# EAGLE board Schematic_Open-Book v1 (EAGLE 9.7.0)
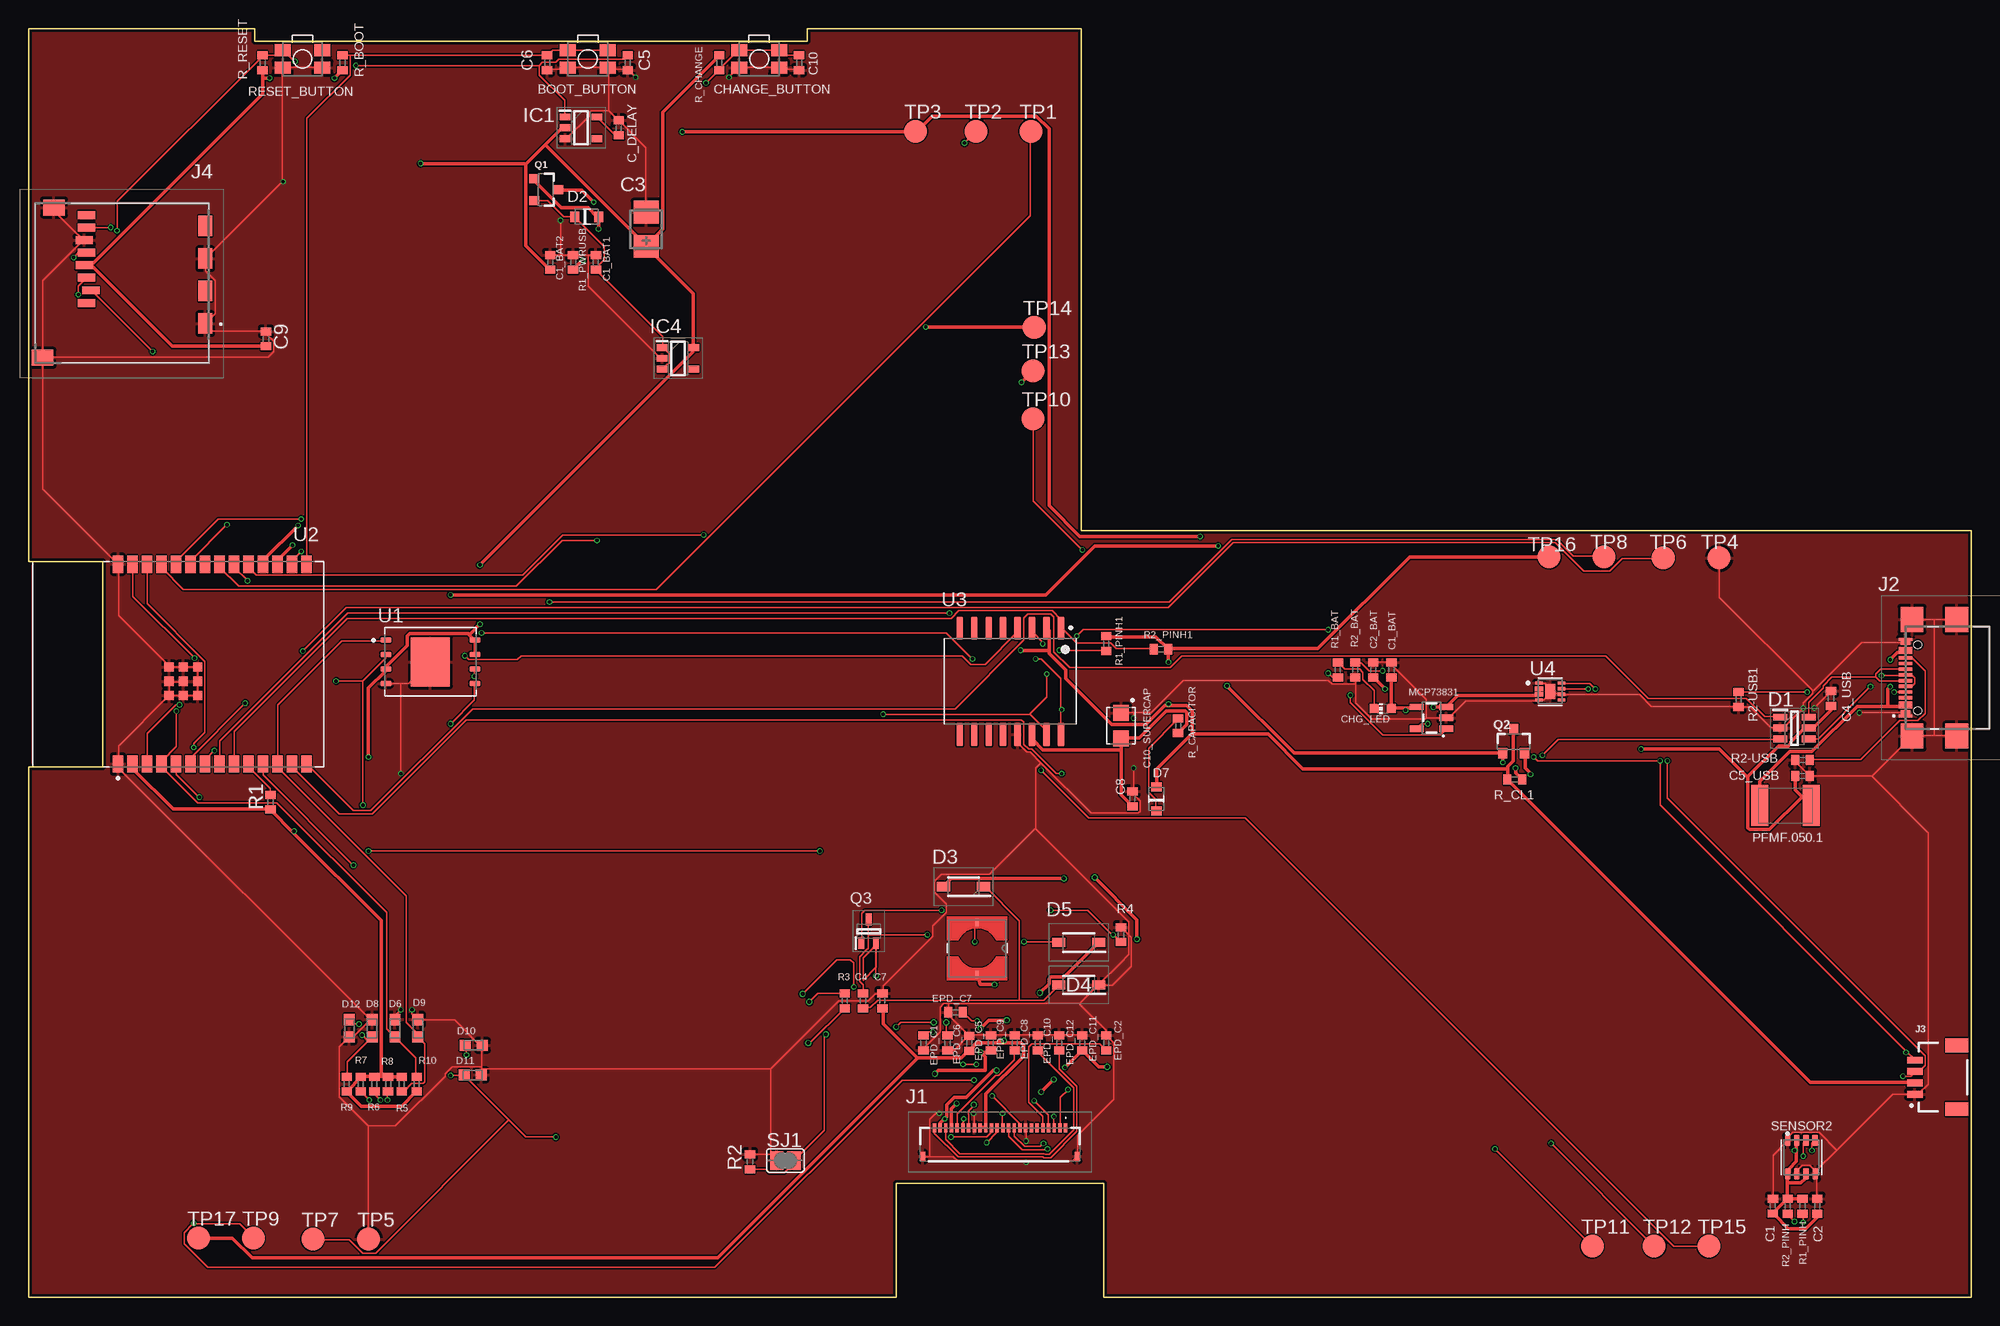
[diagram p0: board, top side]
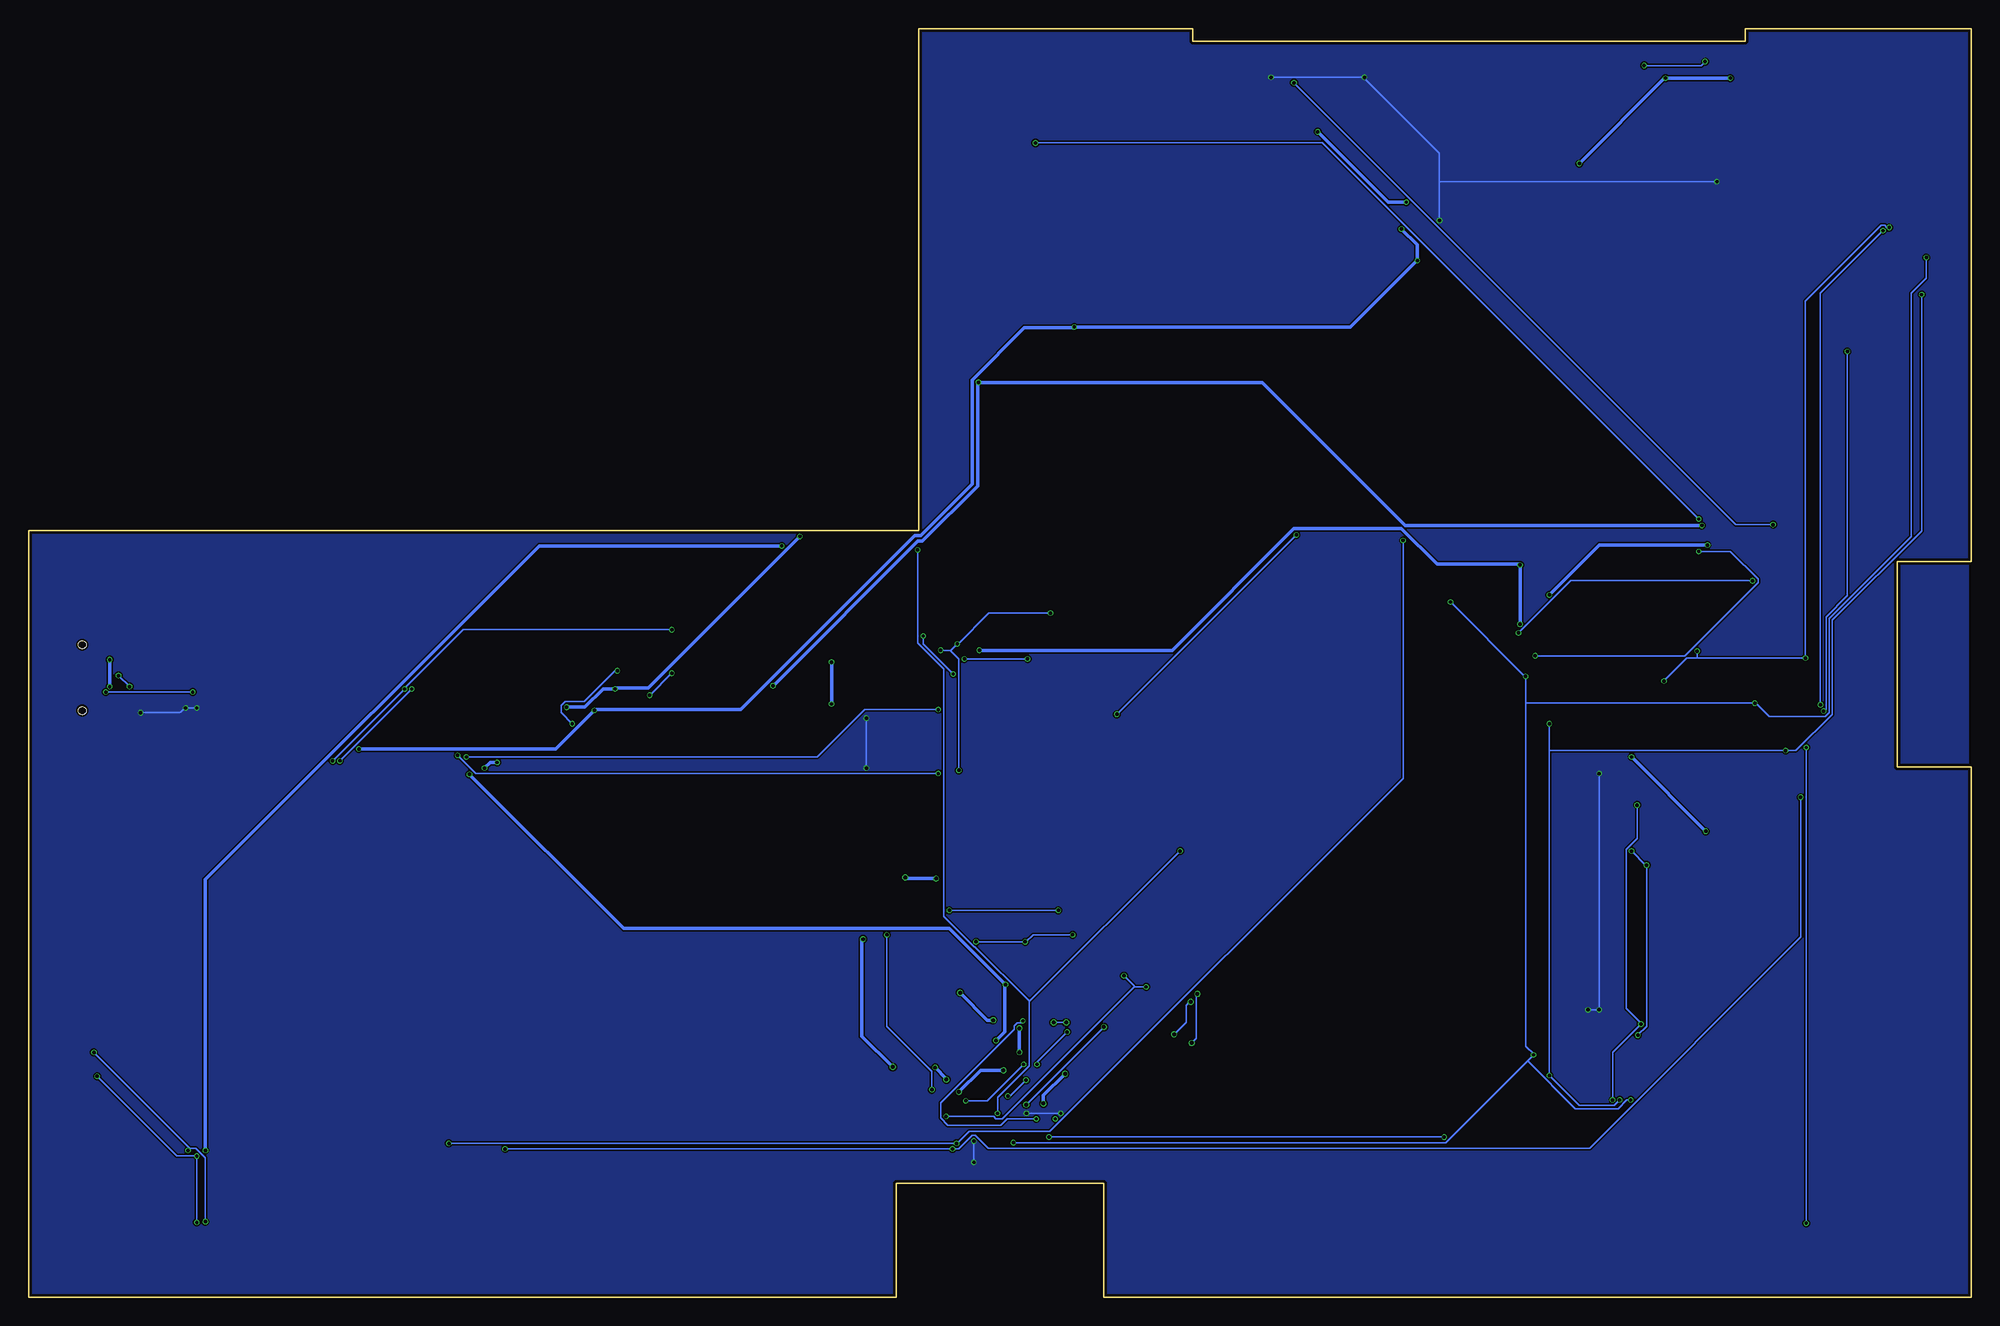
[diagram p1: board, bottom side, seen from below]

Size 170.2 x 111.2 mm. Coordinates in mm from the lower left corner, seen from the top.
Outline: 170.2,67.2 92.2,67.2 92.2,111.2 68.2,111.2 68.2,110.1 19.8,110.1 19.8,111.2 0,111.2 0,64.5 6.5,64.5 6.5,46.5 0,46.5 0,0 76,0 76,10 94.2,10 94.2,0 170.2,0 170.2,67.2
Copper layers (1*16): Top 0.035mm / dielectric 1.6mm / Bottom 0.035mm
Design rules "jlcpcb-2layers.dru": minimum track width 0.15mm, minimum drill 0.3mm, track to track 5mil, track to pad 5mil, pad to pad 5mil, via to via 5mil, smd to smd 5mil, copper to edge 0.2mm, drill to drill 6mil, minimum pad ring 10mil, minimum via ring 3mil, stop-mask expansion 4mil, vias tented up to drill 0mil, thermal gap 10mil
Net classes: 1 new_netclass: width 0.3 mm

## Footprints (pad centres in the part's own frame; a part is rotated, then mirrored left to right if it is on the bottom)
MYBUTTON = smd 1.4 x 1.05: 1 1.75,0.75; 2 -1.75,0.75; 3 -1.75,-0.75; 4 1.75,-0.75
ESP32_WROVER_EAGLE-LTSPICE_C0402 = smd 0.7 x 0.9: 1 -0.65,0; 2 0.65,0
RCL_CT3528 = smd 2 x 2.2: + -1.5,0; - 1.5,0
EAGLE-LTSPICE_C0402 = smd 0.7 x 0.9: 1 -0.65,0; 2 0.65,0
CAPCP3225X100N = smd 1.4 x 1.4: 1 -1.1,0; 2 1.1,0
ADAFRUIT_CHIP-LED0603 = smd 0.8 x 0.8: A 0,-0.75; C 0,0.75
SOT95P280X145-6N = smd 1.2 x 0.6: 1 -1.25,0.95; 2 -1.25,0; 3 -1.25,-0.95; 4 1.25,-0.95; 5 1.25,0; 6 1.25,0.95
ESP32_WROVER_AVX---SD0805S020S1R0_AVX_SD0805S020S1R0_0 = smd 0.8 x 0.9: 1 -1.05,0; 2 1.05,0
SOD3716X135N = smd 1.15 x 0.8: 1 -1.75,0; 2 1.75,0
DIOC1608X36N = smd 0.97 x 0.94: 1 -0.75,0; 2 0.75,0
SOT95P280X125-5N = smd 0.9 x 0.6: 1 -1.4,0.95; 2 -1.4,0; 3 -1.4,-0.95; 4 1.4,-0.95; 5 1.4,0.95
SOT95P280X120-5N = smd 0.9 x 0.6: 1 -1.4,0.95; 2 -1.4,0; 3 -1.4,-0.95; 4 1.4,-0.95; 5 1.4,0.95
FH34SRJ24S05SH99 = smd 0.3 x 0.8: 1 5.75,1.45; 2 5.25,1.45; 3 4.75,1.45; 4 4.25,1.45; 5 3.75,1.45; 6 3.25,1.45; 7 2.75,1.45; 8 2.25,1.45; 9 1.75,1.45; 10 1.25,1.45; 11 0.75,1.45; 12 0.25,1.45; 13 -0.25,1.45; 14 -0.75,1.45; 15 -1.25,1.45; 16 -1.75,1.45; 17 -2.25,1.45; 18 -2.75,1.45; 19 -3.25,1.45; 20 -3.75,1.45; 21 -4.25,1.45; 22 -4.75,1.45; 23 -5.25,1.45; 24 -5.75,1.45 | smd 0.4 x 0.8: MP1 6.75,-1.05; MP2 -6.75,-1.05
SAMACSYS_PARTS_USB4110GFA = smd 0.3 x 1.15: A1 -3.35,3.678; A4 -2.55,3.678; A5 -1.25,3.678; A6 -0.25,3.678; A7 0.25,3.678; A8 1.25,3.678; A9 2.55,3.678; A12 3.35,3.678; B4 2.25,3.678; B5 1.75,3.678; B6 0.75,3.678; B7 -0.75,3.678; B8 -1.75,3.678; B9 -2.25,3.678 | smd 0.406 x 0.813: B1 3.05,3.678; B12 -3.05,3.678 | smd 2.18 x 2: MP1 -5.11,-0.827; MP2 5.11,-0.827; MP3 -5.11,3.103; MP4 5.11,3.103 | hole 0.65: -2.89,2.603; 2.89,2.603
JST04_1MM_RA = smd 0.6 x 1.35: 1 -1.5,0; 2 -0.5,0; 3 0.5,0; 4 1.5,0 | smd 1.2 x 2: NC1 2.8,-3.675; NC2 -2.8,-3.675
112ATAARR03ATTEND = smd 1.8 x 1.2: G1 10.6,10.4; G2 4.9,10.4; S1 7.75,10.4; S2 2.05,10.4 | smd 1.4 x 1.9: G3 13.6,-3.85; G4 0.45,-2.85 | smd 0.7 x 1.5: P1 8.8,0; P2 7.7,0.4; P3 6.6,0; P4 5.5,-0.2; P5 4.4,0; P6 3.3,-0.2; P7 2.2,0; P8 1.1,0
IND_4828-WE-TPC_WRE = smd 0.61 x 0.305: 1 -2.286,0; 2 2.286,0
ESP32_WROVER_SPARKFUN-IC-POWER_SOT23-5 = smd 0.55 x 1.2: 1 -0.95,-1.3; 2 0,-1.3; 3 0.95,-1.3; 4 0.95,1.3; 5 -0.95,1.3
ESP32C6_VARISTOR_CT/CN1812 = smd 1.5 x 3.6: 1 -2.25,0; 2 2.25,0
ESP32_WROVER_SPARKFUN-DISCRETESEMI_SOT23-3 = smd 0.8 x 0.9: 1 -0.95,-1; 2 0.95,-1; 3 0,1.1
SOT65P210X110-3N = smd 1.05 x 0.5: 1 -1.05,0.65; 2 -1.05,-0.65; 3 1.05,0
ESP32_WROVER_EAGLE-LTSPICE_R0402 = smd 0.7 x 0.9: 1 -0.65,0; 2 0.65,0
ESP32_WROVER_BME680_PSON80P300X300X100-8N = smd 1.016 x 0.5: 1 1.458,1.2; 2 1.458,0.4; 3 1.458,-0.4; 4 1.458,-1.2; 5 -1.458,-1.22; 6 -1.458,-0.4; 7 -1.458,0.4; 8 -1.458,1.2
SJ = smd 1.168 x 1.6: 1 -0.762,0; 2 0.762,0
TP20R = smd 2 x 2: TP 0,0
SON127P600X800X80-9N = smd 0.94 x 0.44: 1 -3.895,1.905; 2 -3.895,0.635; 3 -3.895,-0.635; 4 -3.895,-1.905; 5 3.895,-1.905; 6 3.895,-0.635; 7 3.895,0.635; 8 3.895,1.905 | smd 3.4 x 4.3: 9 0,0
XCVR_ESP32-C6-WROOM-1-N8 = smd 1.5 x 0.9: 1 -8.75,5.26; 2 -8.75,3.99; 3 -8.75,2.72; 4 -8.75,1.45; 5 -8.75,0.18; 6 -8.75,-1.09; 7 -8.75,-2.36; 8 -8.75,-3.63; 9 -8.75,-4.9; 10 -8.75,-6.17; 11 -8.75,-7.44; 12 -8.75,-8.71; 13 -8.75,-9.98; 14 -8.75,-11.25; 15 8.75,-11.25; 16 8.75,-9.98; 17 8.75,-8.71; 18 8.75,-7.44; 19 8.75,-6.17; 20 8.75,-4.9; 21 8.75,-3.63; 22 8.75,-2.36; 23 8.75,-1.09; 24 8.75,0.18; 25 8.75,1.45; 26 8.75,2.72; 27 8.75,3.99; 28 8.75,5.26 | smd 0.8 x 0.8: 29_1 -2.755,0.79; 29_2 -1.505,0.79; 29_3 -0.255,0.79; 29_4 -2.755,-0.46; 29_5 -1.505,-0.46; 29_6 -0.255,-0.46; 29_7 -2.755,-1.71; 29_8 -1.505,-1.71; 29_9 -0.255,-1.71
SOIC127P1032X265-16N = smd 2.05 x 0.59: 1 -4.655,4.445; 2 -4.655,3.175; 3 -4.655,1.905; 4 -4.655,0.635; 5 -4.655,-0.635; 6 -4.655,-1.905; 7 -4.655,-3.175; 8 -4.655,-4.445; 9 4.655,-4.445; 10 4.655,-3.175; 11 4.655,-1.905; 12 4.655,-0.635; 13 4.655,0.635; 14 4.655,1.905; 15 4.655,3.175; 16 4.655,4.445
SON50P200X200X80-9N = smd 0.76 x 0.27: 1 -0.985,0.75; 4 -0.985,-0.75; 5 0.985,-0.75; 6 0.985,-0.25; 7 0.985,0.25; 8 0.985,0.75 | smd 0.813 x 0.406: 2 -0.985,0.25; 3 -0.985,-0.25 | smd 0.9 x 1.3: 9 0,0

## Placement (x,y rotation side)
BOOT_BUTTON  BOOT_BUTTON  [MYBUTTON]  49,108.53 180 top
C1  100nF  [ESP32_WROVER_EAGLE-LTSPICE_C0402]  152.8,8 89.4 top
C1_BAT  4.7uF  [ESP32_WROVER_EAGLE-LTSPICE_C0402]  119.4,55 90 top
C1_BAT1  4.7uF  [ESP32_WROVER_EAGLE-LTSPICE_C0402]  49.7,90.7 90 top
C1_BAT2  4.7uF  [ESP32_WROVER_EAGLE-LTSPICE_C0402]  45.7,90.7 90 top
C2  100nF  [ESP32_WROVER_EAGLE-LTSPICE_C0402]  156.7,8 90 top
C2_BAT  4.7uF  [ESP32_WROVER_EAGLE-LTSPICE_C0402]  117.8,55 90 top
C3  100uF TANT  [RCL_CT3528]  54.1,93.6 90 top
C4  4.7uF/25V  [ESP32_WROVER_EAGLE-LTSPICE_C0402]  73.1,26 90 top
C4_USB  100nF  [EAGLE-LTSPICE_C0402]  157.9,52.5 90 top
C5  1uF  [ESP32_WROVER_EAGLE-LTSPICE_C0402]  52.5,108.2 270 top
C5_USB  4.7uF  [EAGLE-LTSPICE_C0402]  155.4,45.7 0 top
C6  100nF  [ESP32_WROVER_EAGLE-LTSPICE_C0402]  45.42,108.2 270 top
C7  10uF  [ESP32_WROVER_EAGLE-LTSPICE_C0402]  74.8,26 90 top
C8  100nF  [ESP32_WROVER_EAGLE-LTSPICE_C0402]  96.7,43.7 90 top
C9  100nF  [ESP32_WROVER_EAGLE-LTSPICE_C0402]  20.8,84 90 top
C10  100nF  [ESP32_WROVER_EAGLE-LTSPICE_C0402]  67.5,108.2 270 top
C10_SUPERCAP  CPH3225A  [CAPCP3225X100N]  95.7,50.1 270 top
C_DELAY  100nF  [ESP32_WROVER_EAGLE-LTSPICE_C0402]  51.7,102.5 90 top
CHANGE_BUTTON  CHANGE_BUTTON  [MYBUTTON]  64,108.53 180 top
CHG_LED  [ADAFRUIT_CHIP-LED0603]  118.62,51.6 90 top
D1  USBLC6-2SC6Y  [SOT95P280X145-6N]  154.7,49.9 0 top
D2  ESP32_WROVER_AVX---SD0805S020S1R0_AVX_SD0805S020S1R0_0_0AVX_SD0805S020S1R0_0_0  [ESP32_WROVER_AVX---SD0805S020S1R0_AVX_SD0805S020S1R0_0]  48.9,94.7 0 top
D3  MBR0530  [SOD3716X135N]  81.9,36 180 top
D4  MBR0530  [SOD3716X135N]  92,27.4 180 top
D5  MBR0530  [SOD3716X135N]  92,31.1 180 top
D6  PGB1010603MR  [DIOC1608X36N]  32.1,23.6 90 top
D7  ESP32_WROVER_AVX---SD0805S020S1R0_AVX_SD0805S020S1R0_0_0AVX_SD0805S020S1R0_0_0  [ESP32_WROVER_AVX---SD0805S020S1R0_AVX_SD0805S020S1R0_0]  98.8,43.7 90 top
D8  PGB1010603MR  [DIOC1608X36N]  30.1,23.6 90 top
D9  PGB1010603MR  [DIOC1608X36N]  34.1,23.6 90 top
D10  PGB1010603MR  [DIOC1608X36N]  39,22.1 0 top
D11  PGB1010603MR  [DIOC1608X36N]  38.9,19.5 0 top
D12  PGB1010603MR  [DIOC1608X36N]  28.1,23.6 270 top
EPD_C1  1uF/50V  [ESP32_WROVER_EAGLE-LTSPICE_C0402]  78.4,22.3 270 top
EPD_C2  1uF/50V  [ESP32_WROVER_EAGLE-LTSPICE_C0402]  94.4,22.3 90 top
EPD_C5  0.1uF/50V  [EAGLE-LTSPICE_C0402]  82.4,22.27 90 top
EPD_C6  1uF/50V  [EAGLE-LTSPICE_C0402]  80.5,22.3 270 top
EPD_C7  1uF/50V  [EAGLE-LTSPICE_C0402]  81.2,25 180 top
EPD_C8  1uF/50V  [EAGLE-LTSPICE_C0402]  86.4,22.3 90 top
EPD_C9  1uF/50V  [EAGLE-LTSPICE_C0402]  84.3,22.3 90 top
EPD_C10  1uF/50V  [EAGLE-LTSPICE_C0402]  88.4,22.3 90 top
EPD_C11  1uF/50V  [EAGLE-LTSPICE_C0402]  92.3,22.3 90 top
EPD_C12  1uF/50V  [EAGLE-LTSPICE_C0402]  90.3,22.3 90 top
IC1  BD5229G-TR  [SOT95P280X125-5N]  48.4,102.5 0 top
IC4  XC6220A331MR-G  [SOT95P280X120-5N]  56.9,82.3 0 top
J1  FH34SRJ-24S-0.5SH_99_  [FH34SRJ24S05SH99]  85.1,13.4 0 top
J2  SAMACSYS_PARTS_USB4110-GF-A  [SAMACSYS_PARTS_USB4110GFA]  168.1,54.31 90 top
J3  QWIIC_RIGHT_ANGLE  [JST04_1MM_RA]  165.25,19.3 90 top
J4  112A-TAAR-R03_ATTEND  [112ATAARR03ATTEND]  5.08,95.95 270 top
L1  68uH  [IND_4828-WE-TPC_WRE]  83.1,30.6 270 top
MCP73831  ESP32_WROVER_SPARKFUN-IC-POWER_MCP73831  [ESP32_WROVER_SPARKFUN-IC-POWER_SOT23-5]  122.9,50.8 90 top
PFMF.050.1  ESP32C6_VARISTORCN1812  [ESP32C6_VARISTOR_CT/CN1812]  153.9,43.1 0 top
Q1  20V/4.2A/52mΩ/1.4W  [ESP32_WROVER_SPARKFUN-DISCRETESEMI_SOT23-3]  45.3,97.08 270 top
Q2  20V/4.2A/52mΩ/1.4W  [ESP32_WROVER_SPARKFUN-DISCRETESEMI_SOT23-3]  130.1,48.7 0 top
Q3  SI1308EDL-T1-GE3  [SOT65P210X110-3N]  73.6,32.1 90 top
R1  10k  [ESP32_WROVER_EAGLE-LTSPICE_R0402]  21.2,43.4 90 top
R1_BAT  200  [ESP32_WROVER_EAGLE-LTSPICE_R0402]  114.7,55 90 top
R1_PINH  10k  [ESP32_WROVER_EAGLE-LTSPICE_R0402]  155.4,8 90 top
R1_PINH1  10k  [ESP32_WROVER_EAGLE-LTSPICE_R0402]  94.4,57.3 90 top
R1_PWRUSB  100k  [ESP32_WROVER_EAGLE-LTSPICE_R0402]  47.7,90.7 90 top
R2  2.2  [ESP32_WROVER_EAGLE-LTSPICE_R0402]  63.2,11.9 270 top
R2-USB  5k1  [ESP32_WROVER_EAGLE-LTSPICE_R0402]  155.4,47.1 180 top
R2-USB1  5k1  [ESP32_WROVER_EAGLE-LTSPICE_R0402]  149.8,52.4 90 top
R2_BAT  2k  [ESP32_WROVER_EAGLE-LTSPICE_R0402]  116.23,55 90 top
R2_PINH  10k  [ESP32_WROVER_EAGLE-LTSPICE_R0402]  154.1,8 90 top
R2_PINH1  10k  [ESP32_WROVER_EAGLE-LTSPICE_R0402]  99.2,56.8 0 top
R3  0.47  [ESP32_WROVER_EAGLE-LTSPICE_R0402]  71.5,26 90 top
R4  10k  [ESP32_WROVER_EAGLE-LTSPICE_R0402]  95.7,31.8 90 top
R5  10k  [ESP32_WROVER_EAGLE-LTSPICE_R0402]  32.7,18.7 90 top
R6  10k  [ESP32_WROVER_EAGLE-LTSPICE_R0402]  30.3,18.7 90 top
R7  10k  [ESP32_WROVER_EAGLE-LTSPICE_R0402]  29.1,18.7 90 top
R8  10k  [ESP32_WROVER_EAGLE-LTSPICE_R0402]  31.5,18.7 90 top
R9  10k  [ESP32_WROVER_EAGLE-LTSPICE_R0402]  27.87,18.7 270 top
R10  10k  [ESP32_WROVER_EAGLE-LTSPICE_R0402]  34,18.7 270 top
R_BOOT  10k  [ESP32_WROVER_EAGLE-LTSPICE_R0402]  27.5,108.2 90 top
R_CAPACITOR  15  [ESP32_WROVER_EAGLE-LTSPICE_R0402]  100.7,50.1 90 top
R_CHANGE  10k  [ESP32_WROVER_EAGLE-LTSPICE_R0402]  60.5,108.2 270 top
R_CL1  10k  [ESP32_WROVER_EAGLE-LTSPICE_R0402]  130.2,45.4 0 top
R_RESET  10k  [ESP32_WROVER_EAGLE-LTSPICE_R0402]  20.5,108.19 90 top
RESET_BUTTON  RESET_BUTTON  [MYBUTTON]  24,108.53 180 top
SENSOR2  BME688  [ESP32_WROVER_BME680_PSON80P300X300X100-8N]  155.3,12.3 90 top
SJ1  [SJ]  66.3,12 0 top
TP1  TPTP20R  [TP20R]  87.8,102.2 0 top
TP2  TPTP20R  [TP20R]  83,102.2 0 top
TP3  TPTP20R  [TP20R]  77.7,102.2 0 top
TP4  TPTP20R  [TP20R]  148.1,64.8 0 top
TP5  TPTP20R  [TP20R]  29.8,5.1 0 top
TP6  TPTP20R  [TP20R]  143.2,64.8 0 top
TP7  TPTP20R  [TP20R]  24.9,5.1 0 top
TP8  TPTP20R  [TP20R]  138,64.9 0 top
TP9  TPTP20R  [TP20R]  19.7,5.2 0 top
TP10  TPTP20R  [TP20R]  88,77 0 top
TP11  TPTP20R  [TP20R]  137,4.5 0 top
TP12  TPTP20R  [TP20R]  142.4,4.5 0 top
TP13  TPTP20R  [TP20R]  88,81.2 0 top
TP14  TPTP20R  [TP20R]  88.1,85 0 top
TP15  TPTP20R  [TP20R]  147.2,4.5 0 top
TP16  TPTP20R  [TP20R]  133.2,64.9 0 top
TP17  TPTP20R  [TP20R]  14.9,5.2 0 top
U1  W25Q512JVEIQ  [SON127P600X800X80-9N]  35.2,55.7 0 top
U2  ESP32-C6-WROOM-1-N8  [XCVR_ESP32-C6-WROOM-1-N8]  13.1,55.5 90 top
U3  DS3231SN#  [SOIC127P1032X265-16N]  86,54 270 top
U4  MAX17048G+T10  [SON50P200X200X80-9N]  133.3,53.1 0 top

## Library data of the parts
BOOT_BUTTON CHANGE_BUTTON CHG_LED PFMF.050.1 RESET_BUTTON SJ1 TP1-TP17 = DeskAssistant v19 v1
C1 C1_BAT C1_BAT1 C1_BAT2 C2 C2_BAT C4 C4_USB C5 C5_USB C6-C10 C_DELAY EPD_C1 EPD_C2 EPD_C5-EPD_C12 = DeskAssistant v19 v1; SPICEMODEL: NONE; SPICEPREFIX: C
C3 = DeskAssistant v19 v1; SPICEPREFIX: C
C10_SUPERCAP = DeskAssistant v19 v1; AVAILABILITY: Not in stock; CHECK_PRICES: https://www.snapeda.com/parts/CPH3225A/Seiko+Instruments/view-part/?ref=eda; DESCRIPTION: 11 mF (EDLC) Supercapacitor 3.3 V 1210 (3225 Metric) - -; MF: Seiko Instruments; MP: CPH3225A; PACKAGE: 1210 Seiko; PRICE: None; PURCHASE-URL: https://www.snapeda.com/api/url_track_click_mouser/?unipart_id=562593&manufacturer=Seiko Instruments&part_name=CPH3225A&search_term=None; SNAPEDA_LINK: https://www.snapeda.com/parts/CPH3225A/Seiko+Instruments/view-part/?ref=snap
D1 = DeskAssistant v19 v1; AVAILABILITY: In Stock; CHECK_PRICES: https://www.snapeda.com/parts/USBLC6-2SC6Y/STMicroelectronics/view-part/?ref=eda; DESCRIPTION: 17V Clamp 5A (8/20µs) Ipp Tvs Diode Surface Mount SOT-23-6; MF: STMicroelectronics; MP: USBLC6-2SC6Y; PACKAGE: SOT-23-6 STMicroelectronics; PRICE: None; SNAPEDA_LINK: https://www.snapeda.com/parts/USBLC6-2SC6Y/STMicroelectronics/view-part/?ref=snap
D2 D7 = DeskAssistant v19 v1; CENTROID_NOT_SPECIFIED: No; DATASHEET: http://datasheets.avx.com/schottky.pdf; DIGIKEY_DESCRIPTION: DIODE SCHOTTKY 20V 1A 0805; DIGIKEY_PART_NUMBER: 478-7800-1-ND; LEAD_FREE: yes; MF: AVX; MOUSER_PART_NUMBER: 581-SD0805S020S1R0; PACKAGE: 0805 (2012 metric); PREFIX: D; ROHS: yes; TEMPERATURE_RANGE_HIGH: +125°C; TEMPERATURE_RANGE_LOW: -55°C
D3-D5 = DeskAssistant v19 v1; AVAILABILITY: In Stock; CHECK_PRICES: https://www.snapeda.com/parts/MBR0530/Onsemi/view-part/?ref=eda; DESCRIPTION: Diode Schottky 30 V 500mA Surface Mount SOD-123; MF: ON Semiconductor; MP: MBR0530; PACKAGE: SOD-123-2 ON Semiconductor; PRICE: None; PURCHASE-URL: https://www.snapeda.com/api/url_track_click_mouser/?unipart_id=179458&manufacturer=ON Semiconductor&part_name=MBR0530&search_term=None; SNAPEDA_LINK: https://www.snapeda.com/parts/MBR0530/Onsemi/view-part/?ref=snap
D6 D8-D12 = DeskAssistant v19 v1; AVAILABILITY: In Stock; CHECK_PRICES: https://www.snapeda.com/parts/PGB1010603MR/Littelfuse/view-part/?ref=eda; DESCRIPTION: 150V (Typ) Clamp - Ipp Tvs Diode Surface Mount 0603 (1608 Metric); MF: Littelfuse Inc.; MP: PGB1010603MR; PACKAGE: 0603 Littelfuse Inc.; PRICE: None; PURCHASE-URL: https://www.snapeda.com/api/url_track_click_mouser/?unipart_id=5659453&manufacturer=Littelfuse Inc.&part_name=PGB1010603MR&search_term=None; SNAPEDA_LINK: https://www.snapeda.com/parts/PGB1010603MR/Littelfuse/view-part/?ref=snap
IC1 = DeskAssistant v19 v1; DESCRIPTION: Voltage Detector with Adjustable Delay Time: CMOS processes are utilized to develop high precision, low current consumption CMOS reset ICs that allow arbitrary setting of the delay time. The extensive lineup includes both Nch Open Drain and CMOS output types in a wide range of detection voltages (from 2.3V to 6.0V, in 0.1V steps), enabling selection of the ideal solution based on customer requirements. In addition, the entire series is of course both lead-free and RoHS-compliant.; HEIGHT: 1.25mm; MANUFACTURER_NAME: ROHM Semiconductor; MANUFACTURER_PART_NUMBER: BD5229G-TR; MOUSER_PART_NUMBER: 755-BD5229G-TR; MOUSER_PRICE-STOCK: https://www.mouser.co.uk/ProductDetail/ROHM-Semiconductor/BD5229G-TR?qs=4kLU8WoGk0vvnhrrYwdszw%3D%3D
IC4 = DeskAssistant v19 v1; DESCRIPTION: LDO Voltage Regulators; HEIGHT: 1.2mm; MANUFACTURER_NAME: Torex; MANUFACTURER_PART_NUMBER: XC6220A331MR-G; MOUSER_PART_NUMBER: 865-XC6220A331MR-G; MOUSER_PRICE-STOCK: https://www.mouser.co.uk/ProductDetail/Torex-Semiconductor/XC6220A331MR-G?qs=AsjdqWjXhJ8ZSWznL1J0gg%3D%3D
J1 = DeskAssistant v19 v1; DESCRIPTION: 24 Position FFC, FPC Connector Contacts, Top and Bottom 0.020" (0.50mm) Surface Mount, Right Angle; HEIGHT: 1.1mm; MANUFACTURER_NAME: Hirose; MANUFACTURER_PART_NUMBER: FH34SRJ-24S-0.5SH(99); MOUSER_PART_NUMBER: 798-FH34SRJ24S05SH99; MOUSER_PRICE-STOCK: https://www.mouser.co.uk/ProductDetail/Hirose-Connector/FH34SRJ-24S-0.5SH99?qs=vcbW%252B4%252BSTIpKBl5ap9J8Fw%3D%3D
J2 = DeskAssistant v19 v1; DESCRIPTION: CONN USB 2.0 TYPE-C R/A SMT; HEIGHT: 3.26mm; MANUFACTURER_NAME: GCT (GLOBAL CONNECTOR TECHNOLOGY); MANUFACTURER_PART_NUMBER: USB4110-GF-A; MOUSER_PART_NUMBER: 640-USB4110-GF-A; MOUSER_PRICE-STOCK: https://www.mouser.co.uk/ProductDetail/GCT/USB4110-GF-A?qs=KUoIvG%2F9IlYiZvIXQjyJeA%3D%3D
J3 = DeskAssistant v19 v1; PROD_ID: CONN-13694
J4 = DeskAssistant v19 v1; DESCRIPTION: Micro SD Card Socket, Push-Push Type, Top Mount, SMT, H=1.83mm, 10u; HEIGHT: 1.9mm; MANUFACTURER_NAME: ATTEND; MANUFACTURER_PART_NUMBER: 112A-TAAR-R03 ATTEND
L1 = DeskAssistant v19 v1; COPYRIGHT: Copyright (C) 2024 Ultra Librarian. All rights reserved.; MANUFACTURER_PART_NUMBER: 744043680; MFR_NAME: Wurth Electronics
MCP73831 = DeskAssistant v19 v1; PROD_ID: IC-09995
Q1 Q2 = DeskAssistant v19 v1; PROD_ID: TRAN-14388
Q3 = DeskAssistant v19 v1; AVAILABILITY: In Stock; CHECK_PRICES: https://www.snapeda.com/parts/SI1308EDL-T1-GE3/Vishay+Siliconix/view-part/?ref=eda; DESCRIPTION: Si1308EDL-T1-GE3 N-channel MOSFET Transistor, 1.5 A, 30 V, 3-Pin SC-70 | Siliconix / Vishay SI1308EDL-T1-GE3; MF: Vishay Siliconix; MP: SI1308EDL-T1-GE3; PACKAGE: SOT-323 Vishay Semiconductor; PRICE: None; PURCHASE-URL: https://www.snapeda.com/api/url_track_click_mouser/?unipart_id=274603&manufacturer=Vishay Siliconix&part_name=SI1308EDL-T1-GE3&search_term=None; SNAPEDA_LINK: https://www.snapeda.com/parts/SI1308EDL-T1-GE3/Vishay+Siliconix/view-part/?ref=snap
R1 R1_BAT R1_PINH R1_PINH1 R1_PWRUSB R2 R2-USB R2-USB1 R2_BAT R2_PINH R2_PINH1 R3-R10 R_BOOT R_CAPACITOR R_CHANGE R_CL1 R_RESET = DeskAssistant v19 v1; SPICEMODEL: NONE; SPICEPREFIX: R
SENSOR2 = DeskAssistant v19 v1; AVAILABILITY: Unavailable; DESCRIPTION: Integrated Environmental Unit; MF: Bosch Sensortec; MP: BME680; PACKAGE: LGA-8 Bosch Tools; PRICE: None
U1 = DeskAssistant v19 v1; AVAILABILITY: In Stock; CHECK_PRICES: https://www.snapeda.com/parts/W25Q512JVEIQ/Winbond+Electronics/view-part/?ref=eda; DESCRIPTION: FLASH - NOR Memory IC 512Mb (64M x 8) SPI - Quad I/O 133 MHz 8-WSON (8x6); MF: Winbond Electronics; MP: W25Q512JVEIQ; PACKAGE: Package; PRICE: None; SNAPEDA_LINK: https://www.snapeda.com/parts/W25Q512JVEIQ/Winbond+Electronics/view-part/?ref=snap
U2 = DeskAssistant v19 v1; AVAILABILITY: In Stock; CHECK_PRICES: https://www.snapeda.com/parts/ESP32-C6-WROOM-1-N8/Espressif+Systems/view-part/?ref=eda; DESCRIPTION: Multiprotocol Modules ESP32-C6 module, Wi-Fi 6 in 2.4 GHz band, Bluetooth 5, Zigbee 3.0 and Thread. ESP34-WROOM Compatible - ENGINEERING SAMPLE; MF: Espressif Systems; MP: ESP32-C6-WROOM-1-N8; PACKAGE: None; PRICE: None; SNAPEDA_LINK: https://www.snapeda.com/parts/ESP32-C6-WROOM-1-N8/Espressif+Systems/view-part/?ref=snap
U3 = DeskAssistant v19 v1; AVAILABILITY: In Stock; CHECK_PRICES: https://www.snapeda.com/parts/DS3231SN%23/Analog+Devices/view-part/?ref=eda; DESCRIPTION: Extremely Accurate I²C-Integrated RTC/TCXO/Crystal; MF: Analog Devices; MP: DS3231SN#; PACKAGE: SOIC-16 Maxim; PRICE: None; PURCHASE-URL: https://www.snapeda.com/api/url_track_click_mouser/?unipart_id=99048&manufacturer=Analog Devices&part_name=DS3231SN#&search_term=None; SNAPEDA_LINK: https://www.snapeda.com/parts/DS3231SN%23/Analog+Devices/view-part/?ref=snap
U4 = DeskAssistant v19 v1; AVAILABILITY: In Stock; CHECK_PRICES: https://www.snapeda.com/parts/MAX17048G+T10/Analog+Devices/view-part/?ref=eda; DESCRIPTION: 3µA 1-Cell/2-Cell Fuel Gauge with ModelGauge; MF: Analog Devices; MP: MAX17048G+T10; PACKAGE: TDFN-8 Maxim; PRICE: None; PURCHASE-URL: https://www.snapeda.com/api/url_track_click_mouser/?unipart_id=329239&manufacturer=Analog Devices&part_name=MAX17048G+T10&search_term=None; SNAPEDA_LINK: https://www.snapeda.com/parts/MAX17048G+T10/Analog+Devices/view-part/?ref=snap

## Nets
3V3 [new_netclass]: C1_BAT2.1 C3.+ C9.1 D7.2 IC1.2 IC4.5 J3.2 J4.P4 Q2.3 R1.1 R1_PINH1.2 R2_PINH1.2 R5.2 R6.2 R7.2 R8.2 R9.2 R10.2 R_BOOT.1 R_CHANGE.1 R_CL1.1 R_RESET.1 TP16.TP U1.3 U1.7 U1.8 U2.2 U3.2
32KHZ: R2_PINH1.1 U2.9 U3.1
DN: D1.4 J2.A7 J2.B7
DP: D1.6 J2.A6 J2.B6
EPD_3V3 [new_netclass]: C7.1 EPD_C5.1 J1.15 J1.16 L1.2 Q2.2 TP17.TP
EPD_3V3_C [new_netclass]: Q2.1 R_CL1.2 TP13.TP U2.18
EPD_BUSY: J1.9 TP9.TP U2.26
EPD_CS: D8.1 J1.12 R9.1 TP10.TP U2.11
EPD_DC: J1.11 TP11.TP U2.5
EPD_RST: J1.10 TP12.TP U2.21
FLASH_CS: D9.1 R5.1 U1.1 U2.12
GDR: J1.2 Q3.1 R4.1
GND: BOOT_BUTTON.1 BOOT_BUTTON.2 C1.2 C1_BAT1.2 C1_BAT2.2 C1_BAT.2 C2.2 C2_BAT.2 C3.- C4_USB.2 C5.2 C5_USB.2 C6.2 C7.2 C8.2 C9.2 C10.2 C10_SUPERCAP.1 C_DELAY.2 CHANGE_BUTTON.1 CHANGE_BUTTON.2 D1.2 D4.1 D6.2 D8.2 D9.2 D10.2 D11.2 D12.2 EPD_C1.2 EPD_C2.2 EPD_C5.2 EPD_C6.2 EPD_C7.2 EPD_C8.2 EPD_C9.2 EPD_C10.2 EPD_C11.2 EPD_C12.2 IC1.3 IC4.2 J1.8 J1.17 J1.MP1 J1.MP2 J2.A1 J2.A12 J2.B1 J2.B12 J2.MP1 J2.MP2 J2.MP3 J2.MP4 J3.1 J4.G1 J4.G2 J4.G3 J4.G4 J4.P6 MCP73831.2 R1_PWRUSB.2 R2-USB1.1 R2-USB.2 R2.1 R2_BAT.1 R4.2 RESET_BUTTON.1 RESET_BUTTON.2 SENSOR2.1 SENSOR2.5 SENSOR2.7 SJ1.1 TP4.TP TP5.TP U1.4 U1.9 U2.1 U2.28 U2.29_1 U2.29_2 U2.29_3 U2.29_4 U2.29_5 U2.29_6 U2.29_7 U2.29_8 U2.29_9 U3.13 U4.1 U4.4 U4.6 U4.9
GPIO8: R1.2 U2.10
I2C_PW [new_netclass]: C1.1 C2.1 R1_PINH.2 R2_PINH.2 SENSOR2.2 SENSOR2.6 SENSOR2.8 U2.17
INT_RTC: R1_PINH1.1 TP15.TP U2.8 U3.3
IO/BOOT: BOOT_BUTTON.3 BOOT_BUTTON.4 C6.1 R_BOOT.2 U2.15
IO/CHANGE: C10.1 CHANGE_BUTTON.3 CHANGE_BUTTON.4 R_CHANGE.2 U2.23
MISO: D12.1 J4.P7 R8.1 TP6.TP U1.2 U2.27
MOSI: D11.1 J1.14 J4.P3 R6.1 TP7.TP U1.5 U2.7
N$1: J2.B5 R2-USB.1
N$2: J2.A5 R2-USB1.2
N$3: C4.1 D3.1 D4.2
N$4: C1_BAT1.1 D2.1 IC4.1 IC4.3 Q1.2
N$5: MCP73831.5 R2_BAT.2
N$6: CHG_LED.C R1_BAT.2
N$7: MCP73831.1 R1_BAT.1
N$8: C_DELAY.1 IC1.5
N$11: EPD_C2.1 J1.5
N$12: EPD_C1.1 J1.4
N$14: D7.1 R_CAPACITOR.2
N$20: EPD_C12.1 J1.24
N$22: EPD_C10.1 J1.22
N$23: EPD_C8.1 J1.20
N$24: EPD_C7.1 J1.19
N$26: EPD_C6.1 J1.18
PREVGH [new_netclass]: D5.1 EPD_C9.1 J1.21
PREVGL [new_netclass]: D3.2 EPD_C11.1 J1.23
RESE: J1.3 Q3.2 R3.1
RESE': R2.2 R3.2 SJ1.2
RESET: C5.1 IC1.1 R_RESET.2 RESET_BUTTON.4 U2.3
RTC_RST: U2.16 U3.4
RX: TP2.TP U2.24
SCK: D10.1 J1.13 J4.P5 R7.1 TP8.TP U1.6 U2.6
SCL: J3.4 R2_PINH.1 SENSOR2.4 U2.20 U3.16 U4.7
SDA: J3.3 R1_PINH.1 SENSOR2.3 U2.19 U3.15 U4.8
SRC: C4.2 D5.2 L1.1 Q3.3
SS_SD: D6.1 J4.P2 R10.1 U2.4
TX: TP1.TP U2.25
USB_D+: D1.1 U2.14
USB_D-: D1.3 U2.13
VBAT [new_netclass]: C2_BAT.1 MCP73831.3 Q1.3 TP3.TP U4.2 U4.3
VBUS [new_netclass]: C1_BAT.1 C4_USB.1 C5_USB.1 CHG_LED.A D1.5 D2.2 MCP73831.4 PFMF.050.1.2 Q1.1 R1_PWRUSB.1 TP14.TP
VRTC [new_netclass]: C8.1 C10_SUPERCAP.2 R_CAPACITOR.1 U3.14
VUSB [new_netclass]: J2.A4 J2.A9 J2.B4 J2.B9 PFMF.050.1.1

## Tracks (layer width: path | path; a pad name or v marks a point on that pad's centre or on a via)
3V3  (via drill 0.3)
  Top 0.3: R2_PINH1.2 99.79,56.85 98.75,57.89 94.46,57.89 R1_PINH1.2 | TP16.TP 133.17,64.89 120.98,64.89 112.95,56.85 100,56.85 R2_PINH1.2 | 101.94,49.44 98.82,46.33 98.82,44.8 D7.2 | 101.94,49.44 101.94,51.38 101.45,51.87 99.86,51.87 | 99.86,51.87 99.51,51.87 97.85,50.21 94.87,50.21 90.86,54.22 90.86,54.98 89.4,56.44 89.4,56.72 | 89.4,56.72 89.4,58.45 89.19,58.66 U3.2 | 129.57,46.33 129.57,46.54 130.05,47.02 130.05,49.79 Q2.3 | 129.57,46.33 129.57,45.43 R_CL1.1 129.64,45.29 156.09,18.84 165.23,18.84 J3.2 | 129.57,46.33 111.63,46.33 108.58,49.38 102.08,49.38 101.94,49.44 | v99.86,55.68 99.86,56.65 R2_PINH1.2 | v99.86,52.01 99.86,51.87 | 38.61,58.07 39.06,57.62 U1.8 39.13,57.48 39.13,56.37 U1.7 | 38.61,58.07 38.5,58.17 33.38,58.17 33.17,57.96 33.17,57.13 31.37,55.33 31.37,55.12 U1.3 31.3,54.91 29.78,53.39 v29.78,47.37 | 30.89,19.39 30.4,19.39 R6.2 30.26,19.39 29.29,19.39 R7.2 29.15,19.32 27.91,18.07 R9.2 27.98,17.94 29.15,16.76 32.69,16.76 33.93,18 R10.2 | 30.89,19.39 31.44,19.39 R8.2 31.65,19.32 32.69,19.32 R5.2 | U2.2 9.14,46.74 9.14,46.33 12.67,42.8 21.19,42.8 R1.1 21.26,42.66 23.16,40.75 | 30.89,19.39 30.89,33.03 23.16,40.75 | v23.27,40.86 23.16,40.75 | 43.56,99.31 43.56,92.17 45.64,90.09 C1_BAT2.1 | 45.26,101 46.74,102.49 46.95,102.49 IC1.2 | 45.26,101 43.56,99.31 | C3.+ 54.15,92.03 58.24,87.95 58.24,83.31 IC4.5 58.17,83.17 58.17,82.82 v39.54,64.19 | R_CHANGE.1 60.45,108.79 55.54,103.88 55.54,93.63 54.15,92.24 C3.+ | 45.26,101 54.02,92.24 C3.+ | C9.1 20.77,83.38 12.6,83.38 5.54,90.44 4.92,90.44 J4.P4 5.61,90.58 20.5,105.47 20.5,106.85 | 20.5,106.85 20.5,107.48 R_RESET.1
  Top 0.3: v26.8,106.85 R_BOOT.1 | 20.5,106.85 v21.12,106.85 | v34.35,99.37 43.42,99.37 43.56,99.31 | v39.54,59 38.61,58.07 | v86.91,56.72 89.4,56.72
  Bottom 0.3: v99.86,52.01 v99.86,55.68 | v23.27,40.86 v29.78,47.37 | v21.12,106.85 v26.8,106.85 26.94,106.78 v34.35,99.37 | v39.54,59 v39.54,64.19 39.68,64.26 46.81,64.26 49.93,67.38 59.35,67.38 70.01,56.72 v86.91,56.72
32KHZ
  Top 0.15: R2_PINH1.1 98.54,56.85 95.29,56.85 94.8,57.34 91.83,57.34 90.51,58.66 U3.1 90.44,58.72 90.44,59.42 89.68,60.18 81.51,60.18 80.81,59.49 27.91,59.49 18,49.58 18,46.81 U2.9
DN  (via drill 0.3)
  Top 0.15: J2.B7 164.47,53.6 165.02,53.6 165.23,53.81 165.23,54.29 165.02,54.5 164.47,54.5 J2.A7 164.4,54.5 v162.32,54.5 | v161.35,53.53 156.78,48.96 D1.4
  Bottom 0.15: v162.32,54.5 v161.35,53.53
DP
  Top 0.15: 161.84,54.36 162.18,54.02 164.4,54.02 J2.A6 | 161.84,54.36 161.84,54.64 162.25,55.05 164.4,55.05 J2.B6 | 161.84,54.36 157.96,54.36 157.2,53.6 157.2,53.39 155.95,52.15 155.95,50.9 D1.6
EPD_3V3  (via drill 0.3)
  Top 0.3: Q2.2 131.09,47.64 131.09,46.4 131.57,45.91 v131.57,45.84 | v84.62,27.42 83.36,27.42 L1.2 | J1.16 83.38,14.89 83.79,14.89 J1.15 83.86,15.03 83.86,17.82 87.19,21.15 87.19,22.09 86.98,22.3 85.45,22.3 | 77.84,20.98 74.86,23.96 74.86,25.35 C7.1 | 77.84,20.98 81.72,20.98 82.34,21.61 EPD_C5.1 | 83.03,22.3 85.45,22.3 | 83.03,22.3 82.48,21.74 EPD_C5.1 | TP17.TP 14.96,5.19 17.87,5.19 19.6,3.46 60.39,3.46 77.77,20.84 77.84,20.98 | 85.45,22.3 v85.45,22.51 85.05,22.51 84.86,22.32 83.1,22.32 | 83.1,22.32 EPD_C5.1 | 83.03,22.3 83.06,22.32 83.1,22.32
  Bottom 0.3: v131.57,45.84 118.07,32.34 89.54,32.34 v84.62,27.42 84.69,27.29 84.69,23.27 v85.45,22.51
EPD_3V3_C  (via drill 0.3)
  Top 0.3: v129.15,46.88 129.15,47.64 Q2.1 129.01,47.71 110.87,47.71 v104.98,53.6 | v130.26,46.4 130.26,45.98 130.81,45.43 R_CL1.2 | v23.61,67.66 20.57,64.61 20.57,64.26 U2.18 | v86.98,80.19 87.95,81.16 TP13.TP
  Bottom 0.3: v129.15,46.88 129.77,46.88 v130.26,46.4 | v23.61,67.66 49.58,67.66 62.12,80.19 v86.98,80.19 87.05,80.05 87.05,71.12 91.89,66.27 92.31,66.27 v104.98,53.6
EPD_BUSY  (via drill 0.3)
  Top 0.15: v84.42,17.66 86.84,15.23 86.84,14.89 J1.9 | v82.82,19.04 76.52,19.04 60.11,2.63 15.72,2.63 13.64,4.71 13.64,5.68 14.4,6.44 14.47,6.44 | 14.47,6.44 18.49,6.44 19.67,5.26 TP9.TP | v14.47,48.2 14.47,48.54 15.44,49.51 15.44,55.75 10.39,60.8 10.39,64.19 U2.26 | v14.47,6.51 14.47,6.44
  Bottom 0.15: v84.42,17.66 84.21,17.66 v82.82,19.04 | v14.47,6.51 v14.47,48.2
EPD_CS  (via drill 0.3)
  Top 0.15: R9.1 27.91,19.39 27.91,20.64 30.05,22.78 D8.1 29.71,22.51 v29.22,22.99 | v28.46,37.88 20.57,45.77 20.57,46.74 U2.11 | v85.32,16.14 85.32,14.89 J1.12 | v92.31,65.51 88.02,69.8 88.02,76.94 TP10.TP | v69.32,39.13 v29.78,39.13
  Bottom 0.15: v29.22,22.99 28.46,23.75 v28.46,37.88 28.53,37.88 v29.78,39.13 | v85.32,16.14 85.32,17.52 82.55,20.29 82.55,25.97 | v92.31,65.51 92.31,57.34 90.03,55.05 90.03,33.38 87.38,30.73 87.31,30.73 82.55,25.97 | v69.32,39.13 82.48,25.97 82.55,25.97
EPD_DC  (via drill 0.3)
  Top 0.15: v89.26,13.02 89.19,12.95 87.05,12.95 85.87,14.13 85.87,14.82 J1.11 | v128.46,13.02 136.98,4.5 TP11.TP | v14.96,43.84 12.95,45.84 12.95,46.74 U2.5
  Bottom 0.15: v128.46,13.02 v89.26,13.02 88.71,13.02 87.53,14.2 87.25,14.2 86.15,13.09 33.45,13.09 14.96,31.58 v14.96,43.84
EPD_RST  (via drill 0.3)
  Top 0.15: v88.92,13.5 88.64,13.23 87.25,13.23 86.36,14.13 86.36,14.82 J1.10 | v133.38,13.5 142.38,4.5 TP12.TP | v49.79,66.34 46.74,66.34 42.73,62.33 18.42,62.33 16.76,63.99 16.76,64.19 U2.21
  Bottom 0.15: v133.38,13.5 v88.92,13.5 88.85,13.5 87.81,14.54 80.75,14.54 49.79,45.5 v49.79,66.34
FLASH_CS
  Top 0.15: R5.1 32.76,18.07 32.89,18.07 33.59,18.77 34.56,18.77 34.69,18.91 34.69,22.23 34.14,22.78 D9.1 34.07,22.85 34.07,23.13 33.1,24.1 33.1,35.18 21.88,46.4 21.88,46.74 U2.12 21.81,46.81 21.81,51.94 27.42,57.55 31.3,57.55 U1.1
GDR  (via drill 0.3)
  Top 0.15: v91.06,18.21 90.37,17.52 90.37,14.89 J1.2 | v79.98,33.93 73.27,33.93 72.99,33.66 72.99,31.09 Q3.1 | v89.54,33.93 92.8,33.93 94.94,31.79 v95.01,31.79
  Top 0.152: v95.01,31.79 95.06,31.79 R4.1
  Bottom 0.15: v91.06,18.21 91.06,19.8 95.01,23.75 v95.01,31.79 | v79.98,33.93 v89.54,33.93
GND  (via drill 0.3)
  Top 0.15: U4.9 133.32,52.96 132.71,52.35 132.34,52.35 U4.4 132.27,52.28 125.9,52.28 124.44,50.83 124.23,50.83 MCP73831.2 124.17,50.76 122.43,50.76 | U4.9 133.38,53.05 133.51,52.91 134.28,52.91 U4.6 134.34,52.84 141.13,52.84 142.17,51.8 149.79,51.8 R2-USB1.1 149.86,51.73 150.83,51.73 152.63,49.93 153.39,49.93 D1.2 153.46,49.93 153.74,49.93 v155.47,51.66 155.47,52.08 156.3,52.91 156.3,53.18 | U4.1 132.34,53.81 132.88,53.81 133.54,53.15 U4.9 | C2_BAT.2 117.86,55.68 119.39,55.68 C1_BAT.2 119.46,55.61 119.46,55.4 122.43,52.42 122.43,50.76 | 116.27,53.74 116.27,52.08 117.66,50.69 122.36,50.69 122.43,50.76 | 116.27,53.74 116.27,54.29 R2_BAT.1 | 96.81,51.24 98.33,51.24 101.17,54.08 113.85,54.08 114.19,53.74 116.27,53.74 | 96.81,51.24 95.7,51.24 C10_SUPERCAP.1 | J2.A1 164.4,50.97 164.4,51.24 J2.B12 164.33,51.24 v160.38,51.24 | v156.44,51.66 157.89,53.12 C4_USB.2 | 156.3,53.18 148.13,61.35 148.13,64.75 TP4.TP | C1.2 152.84,8.66 152.84,12.46 154.08,13.71 SENSOR2.1 154.15,13.78 154.15,14.06 154.57,14.47 156.85,14.47 158.41,12.91 | C2.2 156.64,8.66 156.64,10.73 156.57,10.8 SENSOR2.5 | SENSOR2.7 154.91,10.87 154.91,11.08 155.4,11.56 156.02,11.56 156.5,11.08 156.5,10.87 SENSOR2.5 | 158.41,12.91 156.57,11.08 SENSOR2.5 | 158.41,12.91 163.29,17.8 165.23,17.8 J3.1 165.3,17.87 165.58,17.87 166.41,18.7 166.41,40.72 161.49,45.64 161.49,45.7 | 166.96,59.42 165.02,59.42 J2.MP4 164.95,59.42 164.47,58.93 164.47,57.69 J2.A12 164.4,57.62 164.4,57.41 J2.B1 164.33,57.41 160.59,57.41 156.37,53.18 156.3,53.18 | 166.96,59.42 168.9,59.42 J2.MP2 | R2-USB.2 154.77,47.09 154.77,46.95 156.02,45.7 C5_USB.2 156.09,45.7 161.49,45.7
  Top 0.15: 161.49,45.7 164.95,49.17 J2.MP3 165.02,49.24 166.96,49.24 | 166.96,49.24 168.9,49.24 J2.MP1 | 166.96,49.24 166.96,59.42 | 29.78,15.03 29.78,5.12 TP5.TP | 29.78,15.03 27.21,17.59 27.21,21.95 28.05,22.78 D12.2 28.12,22.85 28.46,22.85 29.92,24.31 30.05,24.31 D8.2 29.92,24.38 7.83,46.47 7.83,46.67 U2.1 7.89,46.81 7.89,48.34 12.26,52.7 U2.29_1 | 32.62,53.81 33.31,53.81 35.18,55.68 U1.9 | 32.62,53.81 31.37,53.81 U1.4 | v32.62,25.21 32.13,24.72 32.13,24.38 D6.2 | v33.59,25.21 33.59,24.86 34.07,24.38 D9.2 34.14,24.31 37.33,24.31 39.61,22.02 D10.2 39.68,22.02 39.68,20.22 | 39.68,20.22 39.68,20.01 | 39.68,20.01 39.68,19.53 D11.2 | v32.62,45.91 32.62,53.81 | 29.78,15.03 32.13,15.03 36.49,19.39 36.49,19.6 37.12,20.22 39.68,20.22 | R2.1 63.23,12.53 65.03,12.53 65.51,12.05 SJ1.1 65.03,12.6 65.03,20.01 | 65.03,20.01 70.98,25.97 73.54,25.97 74.17,26.59 74.79,26.59 C7.2 74.86,26.66 74.86,27.29 79.22,31.65 79.22,32.55 80.41,33.74 80.41,34.48 79.37,35.52 79.37,36.48 79.94,37.05 84.14,37.05 88.16,41.06 88.22,41.06 | 88.67,46.85 87.74,47.78 87.46,47.78 86.7,48.54 86.7,49.31 U3.13 | 88.67,46.85 93.07,42.45 97.23,42.45 97.36,42.59 97.36,43.49 96.74,44.11 96.74,44.32 C8.2 96.81,44.32 v96.81,46.4 | 78.94,12.33 81.02,12.33 81.47,11.88 87.39,11.88 | 78.94,12.33 78.39,12.33 J1.MP2 | v87.39,13.71 87.39,14.82 J1.8 | v87.39,11.84 87.39,11.88 | 87.39,11.88 87.39,11.98 91.48,11.98 91.83,12.33 J1.MP1 91.89,12.4 91.89,14.2 95.08,17.38 95.08,22.3 94.46,22.92 EPD_C2.2 94.39,22.99 94.39,23.41 92.1,25.69 92.1,25.76 | 92.1,25.76 80.61,25.76 | 80.61,25.76 80.19,25.76 79.84,25.41 79.84,23.27 78.46,21.88 78.46,21.68 EPD_C1.2
  Top 0.15: 92.1,25.76 93.67,27.33 93.69,27.35 D4.1 93.76,27.42 95.63,29.29 | 88.67,46.85 88.22,46.4 88.22,41.06 | 88.22,41.06 96.4,32.89 96.4,31.79 | 65.03,20.01 39.68,20.01 | 46.6,91.34 47.64,91.34 R1_PWRUSB.2 47.71,91.34 49.03,91.34 | 46.6,91.34 C1_BAT2.2 | 49.03,91.34 49.65,91.34 C1_BAT1.2 | 49.03,91.34 49.03,88.64 55.33,82.34 55.47,82.34 IC4.2 | 50.83,104.01 49.31,104.01 49.1,103.81 49.1,103.53 47.16,101.59 47.02,101.59 IC1.3 | 50.83,104.01 51.66,103.18 C_DELAY.2 51.73,103.11 54.08,100.76 54.08,95.15 C3.- | C10.2 67.45,107.61 65.93,107.61 65.79,107.75 CHANGE_BUTTON.2 65.72,107.82 62.26,107.82 CHANGE_BUTTON.1 62.19,107.75 v61.35,106.92 | BOOT_BUTTON.2 50.76,107.75 50.9,107.61 52.49,107.61 C5.2 52.56,107.55 v53.18,106.92 | C6.2 45.43,107.61 47.09,107.61 47.23,107.75 BOOT_BUTTON.1 47.3,107.82 50.69,107.82 BOOT_BUTTON.2 | 50.83,104.01 50.83,107.61 BOOT_BUTTON.2 | v46.6,94.39 46.6,91.34 | RESET_BUTTON.2 25.69,107.82 22.3,107.82 RESET_BUTTON.1 22.23,107.75 22.23,97.78 | 22.23,97.78 15.51,91.06 J4.G2 15.51,91 15.51,89.96 16.34,89.12 16.34,86.22 15.51,85.39 J4.G1 15.51,85.32 16.14,84.69 20.77,84.69 C9.2 20.84,84.62 20.84,84.42 21.47,83.79 21.47,82.89 20.98,82.41 1.32,82.41 J4.G3 | J4.G4 2.29,95.5 2.29,95.15 4.29,93.14 4.36,93.14 4.85,92.66 J4.P6 4.78,92.66 1.25,89.12 1.25,82.41 J4.G3 | U2.29_1 12.33,52.77 12.33,53.95 U2.29_2 12.4,53.95 13.5,53.95 U2.29_5 | U2.29_1 12.4,52.77 13.5,52.77 U2.29_4 13.57,52.77 14.75,52.77 U2.29_7 14.82,52.77 14.82,53.95 U2.29_8 14.82,54.02 14.82,55.19 U2.29_9 14.75,55.26 13.57,55.26 U2.29_6 13.5,55.26 12.33,55.26 U2.29_3 12.33,55.33 7.89,59.76 7.89,64.19 U2.28 7.83,64.26 1.25,70.84 1.25,82.34 J4.G3
  Top 0.15: v22.3,97.78 22.23,97.78 | v96.81,50.76 96.81,51.24 | EPD_C11.2 92.24,22.99 90.3,22.99 EPD_C12.2 90.23,22.99 88.43,22.99 EPD_C10.2 88.36,22.99 86.42,22.99 EPD_C8.2 86.36,22.99 84.35,22.99 EPD_C9.2 84.28,22.99 82.41,22.99 EPD_C5.2 | EPD_C6.2 80.54,21.68 81.09,21.68 82.34,22.92 EPD_C5.2 | EPD_C5.2 82.34,22.99 80.61,24.72 80.61,25 EPD_C7.2 80.61,25.07 80.61,25.76 | v79.78,16.14 79.48,16.14 78.94,15.6 78.94,12.33 | J1.17 82.85,15.9 82.78,15.97 v82.78,16.14
  Top 0.152: 95.63,29.29 96.4,30.05 96.4,31.79 | R4.2 96.6,31.55 96.6,29 94.93,27.33 93.67,27.33
  Bottom 0.15: v155.47,51.66 v156.44,51.66 156.5,51.66 156.92,51.24 v160.38,51.24 | v33.59,25.21 v32.62,25.21 v32.62,45.91 | v87.39,11.84 v87.39,13.71 | v61.35,106.92 v53.18,106.92 53.18,106.85 46.6,100.27 46.6,97.78 | 46.6,97.78 v46.6,94.39 | v22.3,97.78 46.6,97.78 | v96.81,46.4 v96.81,50.76 | v82.78,16.14 v79.78,16.14
  pour Bottom: 6.62,64.57 6.57,64.62 0.28,64.62 0.28,64.63 0.28,46.37 0.28,46.38 6.47,46.38 6.62,46.53
  pour Top: 6.62,64.57 6.57,64.62 0.28,64.62 0.28,64.63 0.28,46.37 0.28,46.38 6.47,46.38 6.62,46.53
  pour Bottom: 6.56,46.46 6.54,46.44 6.51,46.42 0.07,46.42 0.07,0.07 75.92,0.07 75.92,10.01 75.94,10.04 75.96,10.06 75.99,10.07 94.21,10.07 94.24,10.06 94.26,10.04 94.28,10.01 94.28,0.07 170.12,0.07 170.12,67.12 92.19,67.12 92.16,67.14 92.14,67.16 92.12,67.19 92.12,111.12 68.28,111.12 68.28,110.09 68.26,110.06 68.24,110.04 68.21,110.03 19.79,110.03 19.76,110.04 19.74,110.06 19.73,110.09 19.73,111.12 0.07,111.12 0.07,64.58 6.51,64.58 6.54,64.56 6.56,64.54 6.58,64.51 6.58,46.49
  pour Top: 6.56,46.46 6.54,46.44 6.51,46.42 0.07,46.42 0.07,0.07 75.92,0.07 75.92,10.01 75.94,10.04 75.96,10.06 75.99,10.07 94.21,10.07 94.24,10.06 94.26,10.04 94.28,10.01 94.28,0.07 170.12,0.07 170.12,67.12 92.19,67.12 92.16,67.14 92.14,67.16 92.12,67.19 92.12,111.12 68.28,111.12 68.28,110.09 68.26,110.06 68.24,110.04 68.21,110.03 19.79,110.03 19.76,110.04 19.74,110.06 19.73,110.09 19.73,111.12 0.07,111.12 0.07,64.58 6.51,64.58 6.54,64.56 6.56,64.54 6.58,64.51 6.58,46.49
GPIO8
  Top 0.15: R1.2 21.19,44.11 21.19,44.6 19.32,46.47 19.32,46.74 U2.10
I2C_PW  (via drill 0.3)
  Top 0.3: 154.84,12.88 154.84,11.91 154.22,11.29 154.22,10.94 154.08,10.87 SENSOR2.8 154.08,10.73 154.08,10.04 | 154.84,12.88 154.84,13.71 SENSOR2.2 | R1_PINH.2 154.22,8.66 R2_PINH.2 | 154.08,10.04 154.08,8.79 R2_PINH.2 | 154.08,10.04 155.26,10.04 155.67,10.46 155.67,10.87 SENSOR2.6 | v104.22,65.86 93.42,65.86 89.12,61.56 v36.98,61.56 | v23.13,65.93 21.81,64.61 21.81,64.26 U2.17 | v154.7,12.88 154.84,12.88 | C2.1 156.64,7.2 156.64,6.99 155.67,6.03 154.15,6.03 152.9,7.27 C1.1 152.84,7.41 154.01,8.59 154.08,8.52 R2_PINH.2
  Bottom 0.3: v154.7,12.88 154.7,36.63 125.48,65.86 v104.22,65.86 | v36.98,61.56 32.62,65.93 v23.13,65.93
INT_RTC  (via drill 0.3)
  Top 0.15: v90.3,56.72 94.39,56.72 R1_PINH1.1 | v88.85,57.27 88.85,57.41 87.95,58.31 87.95,58.66 U3.3 | v80.68,59.97 27.98,59.97 16.76,48.75 16.76,46.81 U2.8 | v88.71,46.19 92.86,42.03 106.58,42.03 144.11,4.5 147.16,4.5 TP15.TP
  Bottom 0.15: 89.4,56.72 v90.3,56.72 | 89.4,56.72 v88.85,57.27 88.78,57.27 86.08,59.97 v80.68,59.97 | v88.71,46.19 88.71,55.95 89.4,56.65 89.4,56.72
IO/BOOT
  Top 0.15: 28.18,108.86 45.36,108.86 C6.1 45.5,108.86 45.91,109.28 47.23,109.28 BOOT_BUTTON.4 47.3,109.28 50.69,109.28 BOOT_BUTTON.3 | 28.18,108.86 27.56,108.86 R_BOOT.2 | 28.18,108.86 28.18,107.13 24.38,103.32 24.38,64.26 U2.15
IO/CHANGE  (via drill 0.3)
  Top 0.15: C10.1 67.45,108.86 66.2,108.86 65.79,109.28 CHANGE_BUTTON.3 65.72,109.28 62.33,109.28 CHANGE_BUTTON.4 62.19,109.28 60.52,107.61 R_CHANGE.2 60.45,107.55 v59.35,106.44 | v17.38,67.73 14.2,64.54 14.2,64.26 U2.23
  Bottom 0.15: v17.38,67.73 20.64,67.73 v59.35,106.44
MISO  (via drill 0.3)
  Top 0.15: v31.44,17.31 31.44,18 R8.1 | v28.95,23.96 28.46,23.96 28.12,24.31 D12.1 | 29.29,54.02 31.3,56.02 31.3,56.3 U1.2 | v29.29,43.14 29.29,54.02 | v14.54,56.02 9.14,61.42 9.14,64.19 U2.27 | 29.29,54.02 v26.94,54.02 | v7.2,93.76 5.12,93.76 J4.P7 | v24.03,56.65 27.84,60.45 99.86,60.45 105.54,66.13 133.72,66.13 136.22,63.64 138.5,63.64 139.61,64.75 143.14,64.75 TP6.TP
  Bottom 0.15: v31.44,17.31 31.44,21.47 v28.95,23.96 28.95,24.03 30.26,25.35 30.26,39.27 29.29,40.23 v29.29,43.14 | 24.03,56.02 24.93,56.02 v26.94,54.02 | 24.03,56.02 v14.54,56.02 14.54,87.32 7.89,93.97 7.62,93.97 7.41,93.76 v7.2,93.76 | 24.03,56.02 v24.03,56.65
MOSI  (via drill 0.3)
  Top 0.15: v80.81,14.06 83.93,14.06 84.35,14.47 84.35,14.82 J1.14 | v46.19,14.06 43.56,14.06 42.07,15.55 | 42.07,15.55 38.16,19.46 D11.1 38.09,19.46 v36.98,19.46 | v30.82,17.31 30.33,17.8 30.33,18 R6.1 | v36.98,50.28 39.06,52.35 39.06,53.74 U1.5 | v16.27,47.92 15.51,47.16 15.51,46.81 U2.7 | v4.36,87.88 4.36,88.64 5.05,89.33 J4.P3 | 42.07,15.55 30.4,3.88 29.29,3.88 28.12,5.05 24.93,5.05 TP7.TP
  Bottom 0.15: v46.19,14.06 v80.81,14.06 | v30.82,17.31 31.3,16.83 34.35,16.83 v36.98,19.46 36.98,47.92 | 36.98,47.92 v36.98,50.28 | 36.98,47.92 v16.27,47.92 15.37,47.92 12.19,51.11 12.19,59.35 4.36,67.17 v4.36,87.88
N$1
  Top 0.15: R2-USB.1 156.09,47.16 160.52,47.16 163.91,50.55 165.51,50.55 166.13,51.18 166.13,54.91 165.02,56.02 164.47,56.02 J2.B5
N$2  (via drill 0.3)
  Top 0.15: v155.81,53.05 149.86,53.05 R2-USB1.2 | v163.43,53.05 164.4,53.05 J2.A5
  Bottom 0.15: v163.43,53.05 v155.81,53.05
N$3
  Top 0.15: 86.77,26.04 88.92,26.04 90.23,27.35 D4.2 | 86.77,26.04 74.37,26.04 73.75,25.41 73.13,25.41 C4.1 | D3.1 83.79,36 86.77,33.02 86.77,26.04
N$4
  Top 0.15: IC4.3 55.54,81.37 55.95,81.78 56.02,81.78 56.16,81.92 56.16,82.68 55.54,83.31 IC4.1 55.54,83.38 55.54,84.21 49.72,90.03 C1_BAT1.1 49.72,90.09 49.72,90.23 50.41,90.92 50.41,92.1 47.85,94.67 D2.1 47.78,94.73 46.88,94.73 45.5,96.12 44.32,96.12 Q1.2
N$5  (via drill 0.3)
  Top 0.15: v118.62,54.91 117.45,54.91 116.75,55.61 116.27,55.61 R2_BAT.2 | v122.57,50.28 122.02,50.28 MCP73831.5
  Bottom 0.15: v118.62,54.91 118.83,54.91 121.53,52.22 123.2,52.22 123.54,51.87 123.54,51.24 v122.57,50.28
N$6
  Top 0.15: CHG_LED.C 117.86,51.66 117.86,53.18 116.89,54.15 116.89,54.78 116.62,55.05 115.3,55.05 114.75,55.61 R1_BAT.2
N$7  (via drill 0.3)
  Top 0.15: v113.85,54.71 114.19,54.36 114.68,54.36 R1_BAT.1 | v115.79,52.77 115.79,52.15 118.62,49.31 123.68,49.31 124.17,49.79 MCP73831.1
  Bottom 0.15: v115.79,52.77 v113.85,54.71
N$8
  Top 0.15: C_DELAY.1 51.66,101.87 51.38,101.87 49.86,103.39 IC1.5
N$11
  Top 0.15: J1.5 88.85,14.89 88.85,15.86 87.6,17.11 87.6,21.95 87.88,22.23 93.83,22.23 94.39,21.68 EPD_C2.1
N$12  (via drill 0.3)
  Top 0.15: v88.09,17.24 89.33,16 89.33,14.89 J1.4 | v83.03,20.43 v81.85,20.43 | v79.22,23.27 78.74,23.27 78.46,22.99 EPD_C1.1
  Bottom 0.15: v88.09,17.24 86.22,17.24 v83.03,20.43 | v81.85,20.43 81.85,20.64 v79.22,23.27
N$14
  Top 0.15: D7.1 98.75,42.66 98.75,43.63 98.13,44.25 98.13,48.13 100.69,50.69 R_CAPACITOR.2
N$20
  Top 0.15: J1.24 79.36,14.82 79.36,14.4 81.44,12.33 88.85,12.33 88.92,12.26 89.54,12.26 91.83,14.54 91.83,18.49 90.3,20.01 90.3,21.61 EPD_C12.1
N$22
  Top 0.15: J1.22 80.33,14.82 80.33,13.85 81.58,12.6 88.99,12.6 89.06,12.53 89.4,12.53 91.55,14.68 91.55,18.35 88.43,21.47 88.43,21.61 EPD_C10.1
N$23
  Top 0.15: EPD_C8.1 86.36,21.61 86.36,20.81 84.99,19.45 84.71,19.45 81.37,16.11 81.37,14.87 J1.20
N$24  (via drill 0.3)
  Top 0.15: v83.1,24.24 82.61,24.24 EPD_C7.1 | J1.19 81.85,14.89 81.85,15.34 81.92,15.4 v81.92,15.65
  Bottom 0.15: v81.92,15.65 84.48,15.65 85.04,15.1 89.68,15.1 90.3,15.72 90.3,17.04 83.85,23.49 83.85,23.79 83.59,24.05 83.28,24.05 v83.1,24.24
N$26  (via drill 0.35)
  Top 0.15: J1.18 82.35,16.05 82.3,16.1 82.3,16.3 82.8,16.8 v82.8,16.9 | v76,23.7 76.4,24.1 v79.3,24.1 | v80.4,24.1 80.4,23.05 EPD_C6.1
  Bottom 0.15: v82.8,16.9 76.1,23.6 76,23.6 v76,23.7 | v80.4,24.1 v79.3,24.1
PREVGH  (via drill 0.35)
  Top 0.3: D5.1 90.73,28.08 89.56,28.08 89.4,27.91 89.4,27.5 v88.6,26.7 | v85.7,24.3 84.1,24.3 v83.4,23.6 | J1.21 80.85,16.55 v81.3,17 | v79.4,19.6 79.7,19.9 83.8,19.9 83.8,21.1 v83.4,21.5 84.15,21.5 EPD_C9.1
  Bottom 0.3: v88.6,26.7 86.2,24.3 v85.7,24.3 | v83.4,23.6 v83.4,21.5 | v81.3,17 81.3,17.7 v79.4,19.6
PREVGL  (via drill 0.3, 0.35)
  Top 0.3: v94.5,20.2 93.75,20.2 EPD_C11.1 90.8,20.15 v90.79,20.15 | v97.1,31.4 97.1,33.1 v93.4,36.8 | v90.7,36.7 80.85,36.7 D3.2 | J1.23 79.85,15.29 80.08,15.53 80.14,15.53 v80.26,15.65 80.42,15.81 80.42,16.87 81.08,17.53 82.14,17.53 84.51,19.9 v84.8,19.9 | v88.7,18 v89.8,19.1
  Bottom 0.3: v94.5,20.2 97.2,22.9 97.2,31.4 v97.1,31.4 | v93.4,36.8 93.3,36.7 v90.7,36.7 | v84.8,19.9 86.8,19.9 v88.7,18 | v89.8,19.1 89.8,19.16 v90.79,20.15
RESE  (via drill 0.3, 0.35)
  Top 0.15: v89.82,15.86 89.82,14.89 J1.3 | 74.24,30.9 v74.24,28.18
  Top 0.152: Q3.2 74.25,28.95 73.1,27.8 73.1,29.75 73.68,30.33 73.68,30.34 74.24,30.9 | R3.1 68.45,22.3 v68.3,22.3 | v67.8,26.6 70.8,29.6 72,29.6 72.3,29.3 v72.3,27.21
  Bottom 0.15: v89.82,15.86 85.66,15.86 85.45,15.65 84.9,15.65 73.34,27.21 | 73.34,27.21 v72.3,27.21 | v74.24,28.18 73.34,27.29 73.34,27.21
  Bottom 0.152: v68.3,22.3 67.9,22.7 67.9,26.6 v67.8,26.6
RESE'  (via drill 0.35)
  Top 0.15: R2.2 63.23,11.22 64.61,11.22 64.89,10.94 66.2,10.94 67.03,11.77 67.03,11.98 SJ1.2 67.1,12.05
  Top 0.152: 67.1,12.05 69.7,14.65 69.7,22.91 v69.85,23.05 | v68.4,25.9 69.15,26.65 R3.2
  Bottom 0.152: v68.4,25.9 68.5,25.9 68.8,25.6 68.8,24.1 v69.85,23.05
RESET  (via drill 0.3)
  Top 0.15: 44.74,107.96 44.74,107.13 46.95,104.91 46.95,103.46 IC1.1 | 44.74,107.96 45.01,108.24 46.19,108.24 46.47,108.52 52.22,108.52 52.49,108.79 C5.1 | v13.23,51.94 12.88,51.94 10.39,49.44 10.39,46.81 U2.3 | v7.76,93.49 7.76,96.05 20.5,108.79 R_RESET.2 20.57,108.86 21.81,108.86 22.23,109.28 RESET_BUTTON.4 22.3,109.35 v23.34,108.31 | v28.67,107.96 44.74,107.96
  Bottom 0.15: v13.23,51.94 13.23,88.02 v7.76,93.49 | v28.67,107.96 23.68,107.96 v23.34,108.31
RTC_RST  (via drill 0.3)
  Top 0.15: v23.89,65.37 23.13,64.61 23.13,64.26 U2.16 | v38.23,56.23 38.57,55.88 42.8,55.88 43.14,56.23 81.78,56.23 82.55,55.47 83.79,55.47 86.63,58.31 U3.4
  Bottom 0.15: v23.89,65.37 21.12,65.37 18.7,62.95 18.7,62.67 25.14,56.23 v38.23,56.23
RX  (via drill 0.3)
  Top 0.15: v23.89,68.21 16.62,68.21 12.95,64.54 12.95,64.26 U2.24 | v81.99,101.17 82.96,102.14 TP2.TP
  Bottom 0.15: v23.89,68.21 56.85,101.17 v81.99,101.17
SCK  (via drill 0.3)
  Top 0.15: v83.93,13.57 84.83,14.47 84.83,14.82 J1.13 | v38.36,21.26 38.36,22.02 38.3,22.09 D10.1 | v29.85,17.31 29.15,18 R7.1 | v39.06,54.43 39.06,55.05 U1.6 | v18.97,52.08 14.2,47.3 14.2,46.81 U2.6 | v3.95,91.13 4.36,91.55 5.05,91.55 J4.P5 | v45.64,60.94 99.93,60.94 105.4,66.41 133.86,66.41 135.31,64.96 137.95,64.96 TP8.TP
  Bottom 0.15: v83.93,13.57 46.05,13.57 38.88,20.74 | 38.88,20.74 v38.36,21.26 38.36,21.33 39.06,22.02 39.06,52.08 | v29.85,17.31 30.19,17.31 30.95,16.55 34.69,16.55 38.88,20.74 | 39.06,52.08 v39.06,54.43 39.13,54.43 v45.64,60.94 | 39.06,52.08 v18.97,52.08 18.91,52.08 17.73,50.9 12.81,50.9 12.46,51.24 12.46,59.49 5.26,66.69 5.26,88.02 3.95,89.33 v3.95,91.13
SCL  (via drill 0.3)
  Top 0.15: v154.7,6.65 154.15,7.2 154.15,7.34 R2_PINH.1 | v156.23,12.88 156.23,13.5 156.44,13.71 SENSOR2.4 | v136.63,53.32 134.34,53.32 U4.7 | 164.5,21.57 165.23,20.84 J3.4 | 164.5,21.57 142.93,43.14 v142.93,47.02 132.2,47.02 v131.85,47.37 | v164.47,21.47 164.47,21.54 164.5,21.57 | v19.18,62.81 18,63.99 18,64.19 U2.20 | v39.68,58.24 80.4,58.24 v82.68,55.95 | v88.22,55.95 88.71,55.95 90.44,54.22 90.44,51.52 | 90.44,51.52 90.44,49.38 U3.16 | v90.51,51.52 90.44,51.52
  Bottom 0.15: v154.7,6.65 154.7,12.26 155.54,13.09 156.02,13.09 | v156.23,12.88 156.02,13.09 | v142.93,47.02 v136.63,53.32 | v164.47,21.47 156.09,13.09 156.02,13.09 | v19.18,62.81 35.11,62.81 v39.68,58.24 | v88.22,55.95 v82.68,55.95 | v131.85,47.37 101.11,47.37 96.95,51.52 v90.51,51.52
SDA  (via drill 0.3)
  Top 0.15: v155.47,6.58 155.47,7.34 R1_PINH.1 | v155.47,12.4 155.47,13.5 155.67,13.71 SENSOR2.3 | v137.25,53.32 136.77,53.81 134.34,53.81 U4.8 | v143.56,47.02 143.56,43.77 166.13,21.19 166.13,20.36 165.58,19.8 165.3,19.8 J3.3 165.23,19.74 164.88,19.39 v164.19,19.39 | v59.14,66.83 46.81,66.83 43.28,63.29 19.94,63.29 19.32,63.92 19.32,64.19 U2.19 | 87.74,51.11 v74.86,51.11 | 87.74,51.11 89.12,49.72 89.12,49.38 U3.15 | v113.85,58.52 92.38,58.52 v91.83,57.96 | v89.19,54.64 89.19,52.63 87.74,51.18 87.74,51.11
  Bottom 0.15: v155.47,6.58 v155.47,12.4 157.2,12.4 v164.19,19.39 | v143.56,47.02 v137.25,53.32 137.25,53.39 132.13,58.52 v113.85,58.52 | v74.86,51.11 v59.14,66.83 | v91.83,57.96 91.83,57.27 v89.19,54.64
SRC  (via drill 0.3)
  Top 0.15: 73.54,31.79 73.54,33.1 Q3.3 | v82.89,31.16 82.89,32.47 L1.1 | 73.54,31.79 v78.74,31.79 | v87.2,31.16 90.19,31.16 D5.2 | C4.2 73.1,27.41 72.82,27.68 72.82,29.86 73.4,30.44 73.4,30.46 73.54,30.6 73.54,31.79
  Bottom 0.15: v78.74,31.79 82.2,31.79 82.82,31.16 v82.89,31.16 v87.2,31.16
SS_SD  (via drill 0.3)
  Top 0.15: R10.1 33.93,19.39 33.93,20.98 32.13,22.78 D6.1 32.06,22.85 31.37,23.55 31.37,33.73 21.74,43.35 14.82,43.35 11.7,46.47 11.7,46.74 U2.4 11.7,46.81 11.7,47.02 12.95,48.27 v12.95,51.38 | v10.87,82.89 5.54,88.22 J4.P2
  Bottom 0.15: v10.87,82.89 10.87,61.49 12.74,59.62 12.74,51.59 v12.95,51.38
TX
  Top 0.15: U2.25 11.7,64.19 11.7,63.92 13.57,62.05 54.98,62.05 87.74,94.8 87.74,102.14 TP1.TP
USB_D+
  Top 0.15: D1.1 153.39,50.9 152.07,50.9 150.48,52.49 141.89,52.49 138.15,56.23 101.04,56.23 100,55.19 91.2,55.19 89.82,56.58 89.82,59.62 89.54,59.9 87.53,59.9 87.19,59.55 87.19,57.62 81.16,51.59 38.92,51.59 29.98,42.66 28.46,42.66 24.38,46.74 U2.14
USB_D-  (via drill 0.3)
  Top 0.15: v132.61,47.51 134,48.89 153.39,48.89 D1.3 | v90.51,45.91 90.03,45.91 87.88,48.06 87.6,48.06 87.19,48.48 87.19,50.41 86.98,50.62 38.36,50.62 30.12,42.38 27.21,42.38 23.13,46.47 23.13,46.74 U2.13
  Bottom 0.15: v132.61,47.51 131.02,45.91 v90.51,45.91
VBAT  (via drill 0.3)
  Top 0.3: U4.2 132.34,53.32 132.34,52.91 U4.3 132.2,52.77 125.2,52.77 124.3,51.87 MCP73831.3 124.17,51.73 v123.06,51.73 | v118.83,53.32 117.86,54.29 C2_BAT.1 | v49.51,95.98 48.48,97.02 46.47,97.02 Q1.3 | v57.27,102.14 77.7,102.14 TP3.TP 77.84,102.21 79.15,103.53 88.29,103.53 89.4,102.42 89.4,69.39 92.1,66.69 v102.63,66.69
  Bottom 0.3: v123.06,51.73 121.47,51.73 119.87,53.32 v118.83,53.32 118.69,53.39 115.92,53.39 v102.63,66.69 | v49.51,95.98 51.11,95.98 v57.27,102.14
VBUS  (via drill 0.3)
  Top 0.3: 120.63,51.66 121.47,51.66 121.53,51.73 MCP73831.4 | 120.63,51.66 119.39,51.66 CHG_LED.A 119.39,51.8 119.39,54.29 C1_BAT.1 | C4_USB.1 157.89,51.8 157.89,51.45 156.37,49.93 155.95,49.93 D1.5 155.81,49.86 155.54,49.86 154.36,48.68 154.36,48.54 154.15,48.34 153.32,48.34 150.62,45.64 | 155.36,43.87 156.09,43.14 PFMF.050.1.2 | 155.36,43.87 154.77,44.46 154.77,45.64 C5_USB.1 | 150.62,45.64 150.62,41.13 150.76,41 152.49,41 155.36,43.87 | v141.27,48.06 148.13,48.06 150.48,45.7 150.62,45.64 | v120.63,51.45 120.63,51.66 | v48.54,90.86 48.48,90.86 47.71,90.09 R1_PWRUSB.1 | v49.93,93.63 49.93,94.67 D2.2 49.79,94.73 49.03,95.5 46.67,95.5 44.32,97.85 44.32,97.99 Q1.1 | v78.6,85.04 88.09,85.04 TP14.TP
  Bottom 0.3: v141.27,48.06 124.03,48.06 v120.63,51.45 120.5,51.52 107.82,51.52 92.59,66.76 92.03,66.76 87.53,71.26 87.53,80.4 82.96,84.97 78.74,84.97 v78.6,85.04 54.43,85.04 48.68,90.79 v48.54,90.86 48.54,92.24 v49.93,93.63
VRTC
  Top 0.3: 95.7,47.99 95.7,48.96 C10_SUPERCAP.2 95.84,49.03 97.3,49.03 99.65,51.38 101.31,51.38 101.45,51.24 101.45,50.21 100.76,49.51 R_CAPACITOR.1 | 95.7,47.99 95.7,44.04 96.67,43.07 C8.1 | 95.7,47.99 88.85,47.99 87.95,48.89 87.95,49.31 U3.14
VUSB  (via drill 0.3)
  Top 0.3: J2.A9 164.4,56.85 164.4,56.58 J2.B4 164.26,56.51 163.71,56.51 v163.08,55.88 | J2.B9 164.4,52.01 164.4,51.8 J2.A4 164.26,51.8 162.88,51.8 | 162.88,51.8 160.18,51.8 156.23,47.85 154.29,47.85 151.66,45.22 151.66,43.14 PFMF.050.1.1 | v163.08,53.53 162.88,53.32 162.88,51.8
  Bottom 0.3: v163.08,53.53 v163.08,55.88